# Altium PCB kernel.PcbDoc (part 3 of 7)
Units mil, origin at the board's own origin, x right, y up, seen from the top; angles counter-clockwise.
Board outline 2360 x 2450.34 mil, 6 copper layers (Top Layer, GND, SIGNAL, POWER, GND1, Bottom Layer), stack 32.112 mil thick; 150 components, 174 nets, 684 pads, 710 vias.
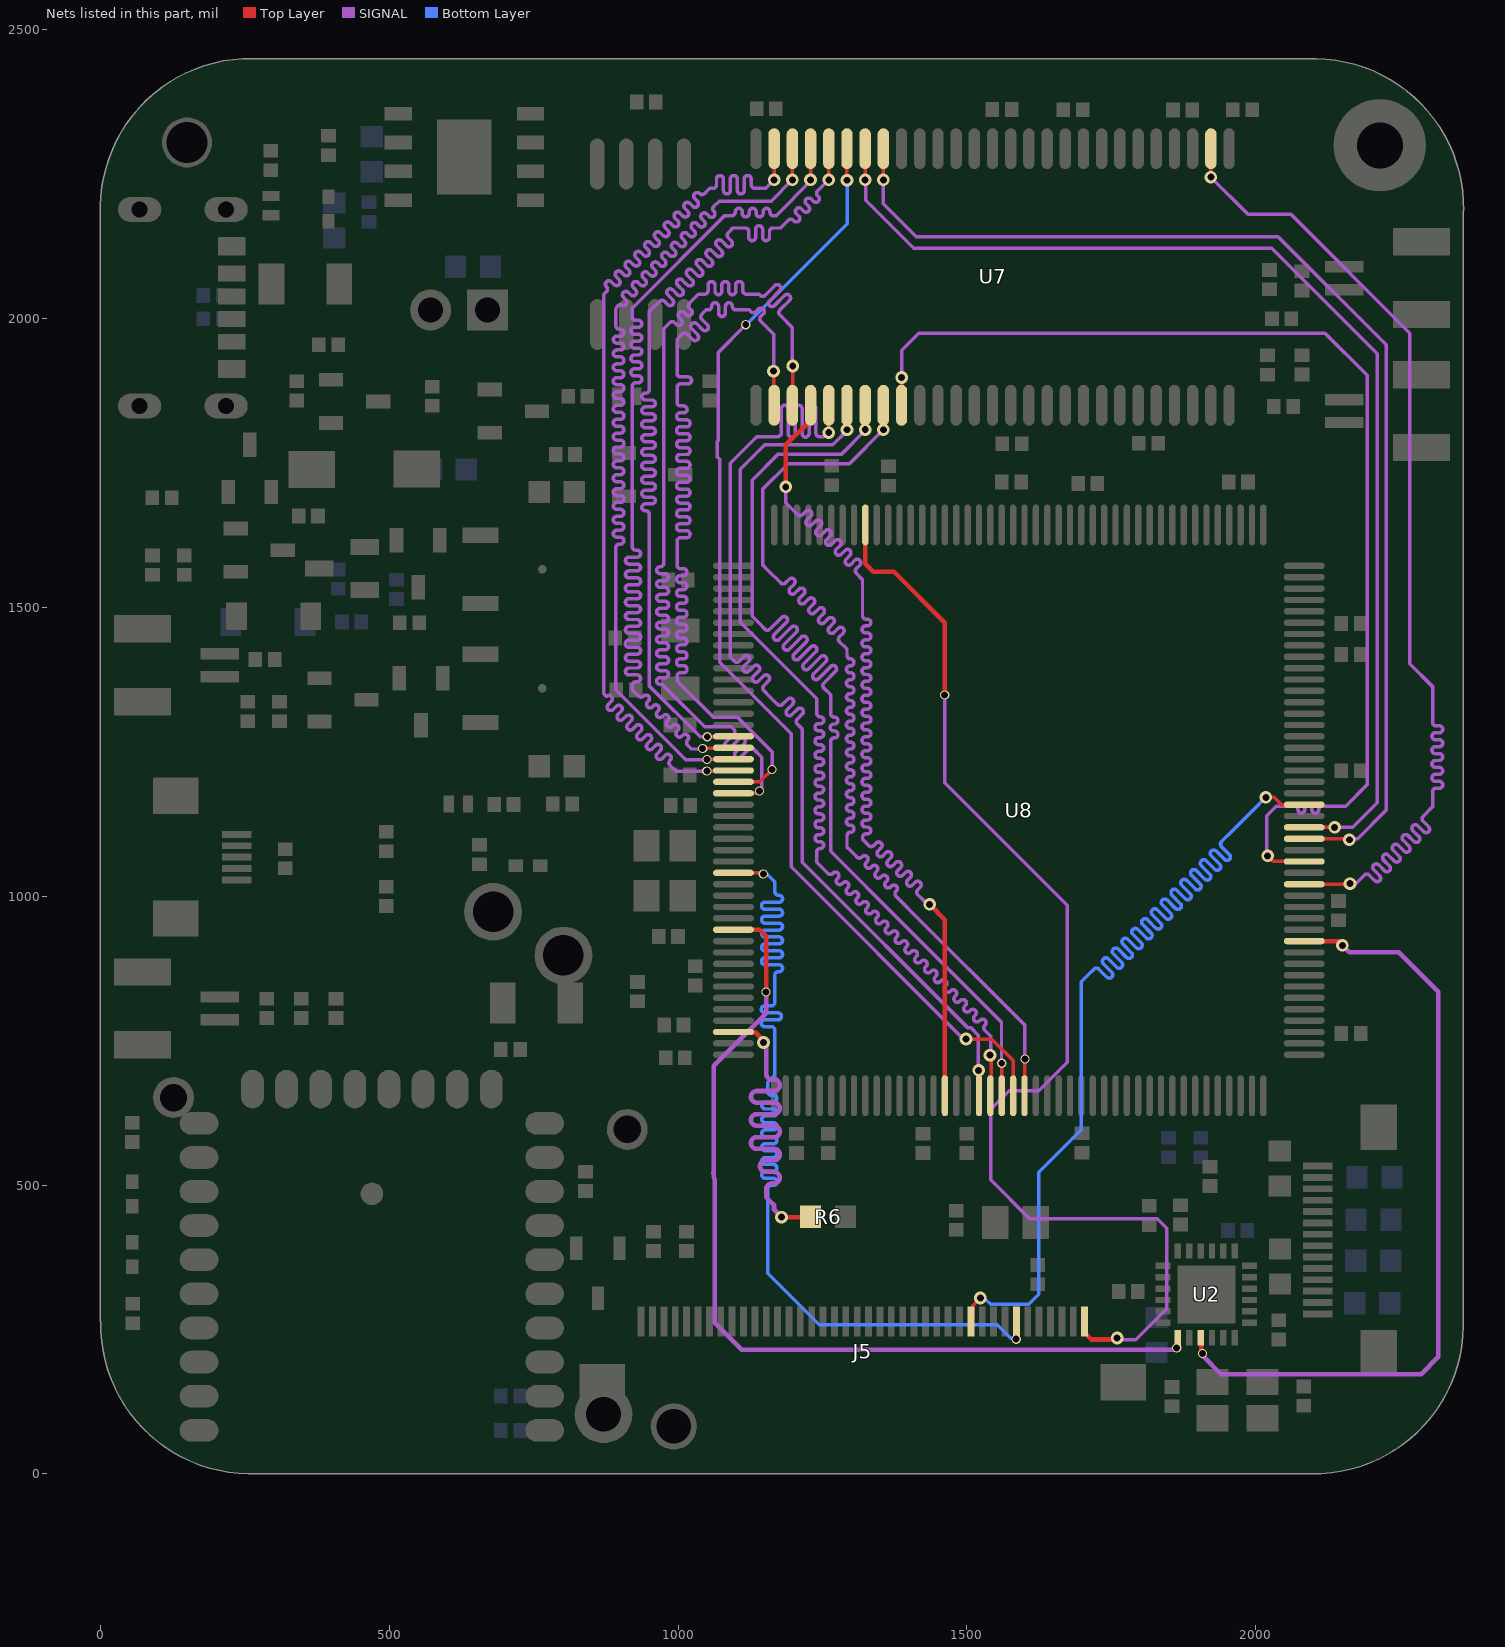
[diagram p6: the nets of this part, all layers, seen from the top]

## Via types
v1: diameter 22, hole 12, Top Layer to Bottom Layer, tented both sides, 583 vias
v2: diameter 16, hole 12, Top Layer to Bottom Layer, tented both sides, 111 vias
v3: diameter 23.62, hole 15.75, Top Layer to Bottom Layer, 8 vias
v4: diameter 28, hole 14, Top Layer to Bottom Layer, 5 vias
v5: diameter 22, hole 12, Top Layer to Bottom Layer, 3 vias

## Nets (pads, with @x,y where several pads share a name; then routed paths per layer and width w, separated by ;. In a path a pad name is that pad's centre, name@x,y a point inside that pad or via, vN(x,y) a via of type N, cw(c..) or ccw(c..) an arc to the next point about the centre after c; other vN are vias at no path point) (continued)
CLK: J5.30 U8.111 | length 1970.2
  Top Layer w6: J5.30@1507.01,263.94 1509.91,266.85 1509.91,291.38 1520.8,302.27 1521.13,302.27 v1(1523.39,304.53) ; v1@2017.27,1171.22 2032.26,1171.22 2044.78,1158.7 U8.111@2084.09,1158.7
  Bottom Layer w6: v1(1523.39,304.53) 1523.39,303.13 1523.9,302.61 1531.97,302.61 1541.16,293.41 1606.89,293.41 1624.56,311.08 1624.56,521.96 1698.17,595.57 1698.17,852.12 1709.48,863.43 1720.09,874.04 cw(c1724.33,869.8) 1728.57,874.04 1742.49,860.12 ccw(c1746.74,864.36) 1750.98,860.12 ccw(c1746.74,864.36) 1750.98,868.61 1736.35,883.23 cw(c1740.59,887.47) 1744.84,891.72 1759.46,877.09 ccw(c1763.71,881.33) 1767.95,877.09 ccw(c1763.71,881.33) 1767.95,885.58 1753.32,900.2 cw(c1757.56,904.45) 1753.32,908.69 cw(c1757.56,904.45) 1761.81,908.69 1776.43,894.06 ccw(c1780.68,898.3) 1784.92,894.06 ccw(c1780.68,898.3) 1784.92,902.55 1770.29,917.17 cw(c1774.54,921.42) 1770.29,925.66 cw(c1774.54,921.42) 1778.78,925.66 1793.4,911.03 ccw(c1797.65,915.28) 1801.89,919.52 1787.26,934.14 cw(c1791.51,938.39) 1787.26,942.63 cw(c1791.51,938.39) 1795.75,942.63 1810.37,928 ccw(c1814.62,932.25) 1818.86,928 ccw(c1814.62,932.25) 1818.86,936.49 1804.23,951.11 cw(c1808.48,955.36) 1804.23,959.6 cw(c1808.48,955.36) 1812.72,959.6 1827.35,944.97 ccw(c1831.59,949.22) 1835.83,944.97 ccw(c1831.59,949.22) 1835.83,953.46 1821.2,968.09 cw(c1825.45,972.33) 1821.2,976.57 cw(c1825.45,972.33) 1829.69,976.57 1844.32,961.94 ccw(c1848.56,966.19) 1852.8,970.43 1838.18,985.06 ; 1838.17,985.06 cw(c1842.42,989.3) 1838.17,993.54 ; 1838.18,993.54 cw(c1842.42,989.3) 1846.66,993.54 1861.29,978.91 ccw(c1865.53,983.16) 1869.77,978.91 ccw(c1865.53,983.16) 1869.77,987.4 1855.15,1002.03 cw(c1859.39,1006.27) 1855.15,1010.51 cw(c1859.39,1006.27) 1863.63,1010.51 1878.26,995.89 ccw(c1882.5,1000.13) 1886.74,995.89 ccw(c1882.5,1000.13) 1886.74,1004.37 1872.12,1019 cw(c1876.36,1023.24) 1880.6,1027.48 1895.23,1012.86 ccw(c1899.47,1017.1) 1903.71,1012.86 ccw(c1899.47,1017.1) 1903.71,1021.34 1889.09,1035.97 cw(c1893.33,1040.21) 1889.09,1044.45 cw(c1893.33,1040.21) 1897.57,1044.45 1912.2,1029.83 ccw(c1916.44,1034.07) 1920.68,1029.83 ccw(c1916.44,1034.07) 1920.68,1038.31 1906.06,1052.94 cw(c1910.3,1057.18) 1906.06,1061.42 cw(c1910.3,1057.18) 1914.54,1061.42 1929.17,1046.8 ccw(c1933.41,1051.04) 1937.65,1055.28 1923.03,1069.91 cw(c1927.27,1074.15) 1923.03,1078.39 cw(c1927.27,1074.15) 1931.51,1078.39 1946.14,1063.77 ccw(c1950.38,1068.01) 1954.62,1063.77 ccw(c1950.38,1068.01) 1954.62,1072.25 1940.71,1086.17 cw(c1944.95,1090.41) 1940.71,1094.66 1959.84,1113.79 1994.47,1148.43 v1@2017.27,1171.22
  other v1: 2017.54,1171.22
CS: J5.40 U8.168 | length 2054.5
  Top Layer w8: U8.168@1324.25,1642.95 1324.25,1575.66 1338.14,1561.77 1373.87,1561.77 1461.88,1473.76 v2@1461.88,1348.43 ; J5.40@1703.86,263.94 1703.86,244.26 1715.45,232.67 1757.6,232.67 v1(1760.24,235.3)
  SIGNAL w6: v2@1461.88,1348.43 1461.88,1196.34 1673.72,984.49 1673.72,712.48 1624.65,663.4 1573.25,663.4 1541.07,631.22 1541.07,509.22 1608.53,441.76 1829.32,441.76 1846,425.08 1846,286.13 1792.11,232.24 1763.3,232.24 v1(1760.24,235.3)
  other v2: 1461.62,1348.68
DEN: J5.34 U8.28 | length 1966
  Top Layer w6: U8.28@1095.91,1040.59 1144.15,1040.59 1146.34,1038.4 v2@1147.97,1038.4 ; J5.34@1585.74,263.94 1585.74,232.33 v2@1585.83,232.24
  Bottom Layer w6: v2@1147.97,1038.4 1149.11,1037.25 1155.48,1037.25 1167.68,1025.06 1167.68,1010.61 1167.68,1007.61 ccw(c1173.68,1007.61) 1173.68,1001.61 1174.93,1001.61 cw(c1174.93,995.61) 1174.93,989.61 1150.63,989.61 ccw(c1150.63,983.61) 1150.63,977.61 1174.93,977.61 cw(c1174.93,971.61) 1174.93,965.61 1150.63,965.61 ccw(c1150.63,959.61) 1150.63,953.61 1174.93,953.61 cw(c1174.93,947.61) 1174.93,941.61 1150.63,941.61 ccw(c1150.63,935.61) 1150.63,929.61 1174.93,929.61 cw(c1174.93,923.61) 1174.93,917.61 1150.63,917.61 ccw(c1150.63,911.61) 1150.63,905.61 1174.93,905.61 cw(c1174.93,899.61) 1174.93,893.61 1150.63,893.61 ccw(c1150.63,887.61) 1150.63,881.61 1174.93,881.61 cw(c1174.93,875.61) 1174.93,869.61 1173.68,869.61 ccw(c1173.68,863.61) 1167.68,863.61 1167.68,849 1167.68,827.05 1167.68,816.26 cw(c1161.68,816.26) 1161.68,810.26 1150.15,810.26 ccw(c1150.15,804.26) 1150.15,798.26 1172.95,798.26 cw(c1172.95,792.26) 1172.95,786.26 1150.15,786.26 ccw(c1150.15,780.26) 1150.15,774.26 1161.68,774.26 cw(c1161.68,768.26) 1167.68,768.26 1167.68,765.26 1167.68,690.51 1156.09,678.92 1155.38,678.21 1155.38,661.74 ccw(c1161.38,661.74) 1161.38,655.74 1165.21,655.74 cw(c1165.21,649.74) 1165.21,643.74 1151.15,643.74 ccw(c1151.15,637.74) 1151.15,631.74 1165.21,631.74 cw(c1165.21,625.74) 1165.21,619.74 1151.15,619.74 ccw(c1151.15,613.74) 1151.15,607.74 1165.21,607.74 cw(c1165.21,601.74) 1165.21,595.74 1151.15,595.74 ccw(c1151.15,589.74) 1151.15,583.74 1165.21,583.74 cw(c1165.21,577.74) 1165.21,571.74 1151.15,571.74 ccw(c1151.15,565.74) 1151.15,559.74 1165.21,559.74 cw(c1165.21,553.74) 1165.21,547.74 1151.15,547.74 ccw(c1151.15,541.74) 1151.15,535.74 1165.21,535.74 cw(c1165.21,529.74) 1165.21,523.74 1151.15,523.74 ccw(c1151.15,517.74) 1151.15,511.74 1165.21,511.74 cw(c1165.21,505.74) 1165.21,499.74 1161.38,499.74 ccw(c1161.38,493.74) 1155.38,493.74 1155.38,454.74 1155.38,347.13 1244.18,258.33 1552.73,258.33 1575.84,235.22 1583.41,235.22 v2(1585.33,233.31)
  other v2: 1147.71,1038.66
ETH_MDC: U2.13 U8.33 | length 1607.8
  Top Layer w8: U8.33@1095.91,942.17 1141.09,942.17 1152.68,930.59 v2@1152.68,834.16 ; v2@1860.95,215 1860.95,216.08 1863.8,218.93 1863.8,234.29 U2.13@1865.31,235.81
  SIGNAL w8: v2@1152.68,834.16 1152.68,797.31 1061.97,706.61 1061.97,529.36 ccw(c1106.87,522.4) 1061.44,522.5 1061.44,522.4 ccw(c1106.87,522.4) 1063.49,508.9 1063.49,261.47 1109.96,215 v2@1860.95,215
  other v2: 1863.17,217.83 1152.42,834.41
ETH_MDIO: R6.1 U8.42 | length 755.8
  Top Layer w8: U8.42@1095.91,765 1096.49,764.42 1133.57,764.42 v1@1152.68,745.32 ; v1(1179.24,444.6) 1228.97,444.6 R6.1@1229.37,445
  SIGNAL w8: v1@1152.68,745.32 1152.68,716.4 1152.68,692.9 ccw(c1162.68,692.9) 1162.68,682.9 1166.12,682.9 cw(c1166.12,672.9) 1166.12,662.9 1136.21,662.9 ccw(c1136.21,652.9) 1136.21,642.9 1166.12,642.9 cw(c1166.12,632.9) 1166.12,622.9 1136.21,622.9 ccw(c1136.21,612.9) 1136.21,602.9 1166.12,602.9 cw(c1166.12,592.9) 1166.12,582.9 1136.21,582.9 ccw(c1136.21,572.9) 1136.21,562.9 1166.12,562.9 cw(c1166.12,552.9) 1166.12,542.9 1151.95,542.9 ccw(c1151.95,532.9) 1151.95,522.9 1166.12,522.9 cw(c1166.12,512.9) 1166.12,502.9 1162.68,502.9 ccw(c1162.68,492.9) 1152.68,492.9 1152.68,478.78 1157.56,473.9 1166.25,465.21 1166.25,457.59 v1(1179.24,444.6)
  other v1: 1148.07,746.81
ETH_RESET: U2.15 U8.99 | length 1366.8
  Top Layer w8: U2.15@1904.68,235.81 1905.95,234.54 1905.95,210.22 v2@1908.12,208.05 ; U8.99@2084.09,922.48 2142.52,922.48 v1(2150,915)
  SIGNAL w8: v2@1908.12,208.05 1908.12,206.12 1910.12,204.12 1910.12,202.59 1939.92,172.79 2286.34,172.79 2316.24,202.69 2316.24,834.59 2248.03,902.8 2162.2,902.8 v1(2150,915)
  other v2: 1907.87,208.3
FMC_A0: U7.23 U8.16 | length 1994.8
  Top Layer w6: v2@1050.58,1275.64 1051.16,1276.23 1095.32,1276.23 U8.16@1095.91,1276.81 ; v1(1260.98,2240.22) U7.23@1260.98,2294.26
  SIGNAL w6: v2@1050.58,1275.64 1050.35,1275.87 1038.25,1275.87 950.55,1363.57 950.55,1658.19 950.55,1661.19 ccw(c944.55,1661.19) 944.55,1667.19 943.27,1667.19 cw(c943.27,1673.19) 943.27,1679.19 954.68,1679.19 ccw(c954.68,1685.19) 954.68,1691.19 943.27,1691.19 cw(c943.27,1697.19) 943.27,1703.19 954.68,1703.19 ccw(c954.68,1709.19) 954.68,1715.19 943.27,1715.19 cw(c943.27,1721.19) 943.27,1727.19 954.68,1727.19 ccw(c954.68,1733.19) 954.68,1739.19 943.27,1739.19 cw(c943.27,1745.19) 943.27,1751.19 954.68,1751.19 ccw(c954.68,1757.19) 954.68,1763.19 943.27,1763.19 cw(c943.27,1769.19) 943.27,1775.19 954.68,1775.19 ccw(c954.68,1781.19) 954.68,1787.19 943.27,1787.19 cw(c943.27,1793.19) 943.27,1799.19 954.68,1799.19 ccw(c954.68,1805.19) 954.68,1811.19 943.27,1811.19 cw(c943.27,1817.19) 943.27,1823.19 954.68,1823.19 ccw(c954.68,1829.19) 954.68,1835.19 943.27,1835.19 cw(c943.27,1841.19) 943.27,1847.19 954.68,1847.19 ccw(c954.68,1853.19) 954.68,1859.19 943.27,1859.19 cw(c943.27,1865.19) 943.27,1871.19 944.55,1871.19 ccw(c944.55,1877.19) 950.55,1877.19 950.55,1908.91 950.55,2012.47 957.44,2019.35 968.05,2029.96 cw(c972.29,2025.72) 976.53,2029.96 982.1,2024.4 ccw(c986.34,2028.64) 990.58,2024.4 ccw(c986.34,2028.64) 990.58,2032.88 982.19,2041.27 cw(c986.43,2045.52) 990.67,2049.76 999.07,2041.37 ccw(c1003.31,2045.61) 1007.55,2041.37 ccw(c1003.31,2045.61) 1007.55,2049.85 999.16,2058.24 cw(c1003.4,2062.49) 999.16,2066.73 cw(c1003.4,2062.49) 1007.64,2066.73 1016.04,2058.34 ccw(c1020.28,2062.58) 1024.52,2058.34 ccw(c1020.28,2062.58) 1024.52,2066.82 1016.13,2075.22 cw(c1020.37,2079.46) 1016.13,2083.7 cw(c1020.37,2079.46) 1024.61,2083.7 1033.01,2075.31 ccw(c1037.25,2079.55) 1041.49,2083.79 1033.1,2092.19 cw(c1037.34,2096.43) 1033.1,2100.67 cw(c1037.34,2096.43) 1041.58,2100.67 1049.98,2092.28 ccw(c1054.22,2096.52) 1058.46,2092.28 ccw(c1054.22,2096.52) 1058.46,2100.76 1050.07,2109.16 cw(c1054.31,2113.4) 1050.07,2117.64 cw(c1054.31,2113.4) 1058.56,2117.64 1066.95,2109.25 ccw(c1071.19,2113.49) 1075.43,2109.25 ccw(c1071.19,2113.49) 1075.43,2117.73 1067.04,2126.13 cw(c1071.28,2130.37) 1067.04,2134.61 cw(c1071.28,2130.37) 1075.53,2134.61 1083.92,2126.22 ccw(c1088.16,2130.46) 1092.4,2134.7 1086.84,2140.27 cw(c1091.08,2144.51) 1086.84,2148.75 1095,2156.92 1101.34,2156.92 1116.34,2156.92 cw(c1116.34,2150.92) 1122.34,2150.92 1122.34,2140.96 ccw(c1128.34,2140.96) 1134.34,2140.96 1134.34,2154.92 cw(c1140.34,2154.92) 1146.34,2154.92 1146.34,2140.96 ccw(c1152.34,2140.96) 1158.34,2140.96 1158.34,2150.92 cw(c1164.34,2150.92) 1164.34,2156.92 1177.44,2156.92 1180.21,2159.69 1190.82,2170.3 cw(c1195.06,2166.05) 1199.31,2170.3 1200.49,2169.11 ccw(c1204.74,2173.35) 1208.98,2169.11 ccw(c1204.74,2173.35) 1208.98,2177.59 1204.96,2181.61 cw(c1209.21,2185.85) 1213.45,2190.1 1217.46,2186.08 ccw(c1221.71,2190.32) 1225.95,2186.08 ccw(c1221.71,2190.32) 1225.95,2194.56 1221.93,2198.58 cw(c1226.18,2202.82) 1221.93,2207.07 cw(c1226.18,2202.82) 1230.42,2207.07 1234.43,2203.05 ccw(c1238.68,2207.29) 1242.92,2203.05 ccw(c1238.68,2207.29) 1242.92,2211.53 1241.73,2212.72 cw(c1245.97,2216.97) 1241.73,2221.21 1253.94,2233.42 1260.74,2240.22 v1(1260.98,2240.22)
  other v2: 1050.61,1276.19
FMC_A1: U7.24 U8.17 | length 2006.5
  Top Layer w6: v2@1042.72,1255 1043.9,1256.17 1094.95,1256.17 U8.17@1095.91,1257.13 ; v1(1229.49,2240.22) U7.24@1229.49,2294.26
  SIGNAL w6: 940.2,1346.56 cw(c935.95,1350.8) 931.71,1346.56 929.59,1348.68 925.07,1353.2 920.61,1357.66 920.61,1365.2 cw(c926.61,1365.2) 926.61,1371.2 929.18,1371.2 ccw(c929.18,1377.2) 929.18,1383.2 914.95,1383.2 cw(c914.95,1389.2) 914.95,1395.2 929.18,1395.2 ccw(c929.18,1401.2) 929.18,1407.2 914.95,1407.2 cw(c914.95,1413.2) 914.95,1419.2 929.18,1419.2 ccw(c929.18,1425.2) 929.18,1431.2 914.95,1431.2 cw(c914.95,1437.2) 914.95,1443.2 929.18,1443.2 ccw(c929.18,1449.2) 929.18,1455.2 914.95,1455.2 cw(c914.95,1461.2) 914.95,1467.2 929.18,1467.2 ccw(c929.18,1473.2) 929.18,1479.2 914.95,1479.2 cw(c914.95,1485.2) 914.95,1491.2 929.18,1491.2 ccw(c929.18,1497.2) 929.18,1503.2 914.95,1503.2 cw(c914.95,1509.2) 914.95,1515.2 929.18,1515.2 ccw(c929.18,1521.2) 929.18,1527.2 914.95,1527.2 cw(c914.95,1533.2) 914.95,1539.2 929.18,1539.2 ccw(c929.18,1545.2) 929.18,1551.2 914.95,1551.2 cw(c914.95,1557.2) 914.95,1563.2 929.18,1563.2 ccw(c929.18,1569.2) 929.18,1575.2 914.95,1575.2 cw(c914.95,1581.2) 914.95,1587.2 929.18,1587.2 ccw(c929.18,1593.2) 929.18,1599.2 926.61,1599.2 cw(c926.61,1605.2) 920.61,1605.2 920.61,1635.33 920.61,1868.07 920.61,1883.07 cw(c926.61,1883.07) 926.61,1889.07 931.33,1889.07 ccw(c931.33,1895.07) 931.33,1901.07 924.5,1901.07 cw(c924.5,1907.07) 924.5,1913.07 931.33,1913.07 ccw(c931.33,1919.07) 931.33,1925.07 924.5,1925.07 cw(c924.5,1931.07) 924.5,1937.07 931.33,1937.07 ccw(c931.33,1943.07) 931.33,1949.07 924.5,1949.07 cw(c924.5,1955.07) 924.5,1961.07 931.33,1961.07 ccw(c931.33,1967.07) 931.33,1973.07 924.5,1973.07 cw(c924.5,1979.07) 924.5,1985.07 931.33,1985.07 ccw(c931.33,1991.07) 931.33,1997.07 926.61,1997.07 cw(c926.61,2003.07) 920.61,2003.07 920.61,2018.38 925.65,2023.42 1080.4,2178.17 1090.19,2178.17 1093.19,2178.17 ccw(c1093.19,2184.17) 1099.19,2184.17 1099.19,2185.02 cw(c1105.19,2185.02) 1111.19,2185.02 1111.19,2182.17 ccw(c1117.19,2182.17) 1123.19,2182.17 1123.19,2185.02 cw(c1129.19,2185.02) 1135.19,2185.02 1135.19,2182.17 ccw(c1141.19,2182.17) 1147.19,2182.17 1147.19,2185.02 cw(c1153.19,2185.02) 1159.19,2185.02 1159.19,2184.17 ccw(c1165.19,2184.17) 1165.19,2178.17 1169.65,2178.17 1174.24,2182.76 1226.49,2235.01 1226.49,2235.6 1229.49,2238.6 v1(1229.49,2240.22) ; 940.22,1346.58 cw(c944.46,1342.34) 948.7,1346.58 cw(c944.46,1342.34) 948.7,1338.1 947.27,1336.66 ccw(c951.51,1332.42) 947.27,1328.18 ccw(c951.51,1332.42) 955.75,1328.18 957.19,1329.61 cw(c961.43,1325.37) 965.67,1321.13 964.24,1319.69 ccw(c968.48,1315.45) 964.24,1311.21 ccw(c968.48,1315.45) 972.72,1311.21 974.16,1312.64 cw(c978.4,1308.4) 982.64,1312.64 cw(c978.4,1308.4) 982.64,1304.16 981.21,1302.72 ccw(c985.45,1298.48) 981.21,1294.23 ccw(c985.45,1298.48) 989.69,1294.23 991.13,1295.67 cw(c995.37,1291.43) 999.61,1295.67 cw(c995.37,1291.43) 999.61,1287.19 998.18,1285.75 ccw(c1002.42,1281.51) 1006.66,1277.26 1008.1,1278.7 cw(c1012.34,1274.46) 1016.59,1278.7 cw(c1012.34,1274.46) 1016.59,1270.22 ; 1016.56,1270.19 ccw(c1020.81,1265.95) 1016.56,1261.71 1023.05,1255.22 1023.27,1255 v2@1041.95,1255 ; v2@1042.72,1255 v2@1041.95,1255 ; v2(1042.72,1255.78) v2@1041.95,1255
FMC_A2: U7.25 U8.18 | length 2012.7
  Top Layer w6: v2@1050.45,1236.72 1050.68,1236.95 1095.41,1236.95 U8.18@1095.91,1237.44 ; v1(1197.99,2240.22) U7.25@1197.99,2294.26
  SIGNAL w6: 900.97,2024.57 900.19,2024.38 ccw(c902.56,2014.42) 892.46,2016.11 892.46,2011.87 892.46,2007.63 892.46,2006.86 892.46,1987.77 ccw(c898.46,1987.77) 898.46,1981.77 900.2,1981.77 cw(c900.2,1975.77) 900.2,1969.77 893.98,1969.77 ccw(c893.98,1963.77) 893.98,1957.77 900.2,1957.77 cw(c900.2,1951.77) 900.2,1945.77 893.98,1945.77 ccw(c893.98,1939.77) 893.98,1933.77 900.2,1933.77 cw(c900.2,1927.77) 900.2,1921.77 893.98,1921.77 ccw(c893.98,1915.77) 893.98,1909.77 900.2,1909.77 cw(c900.2,1903.77) 900.2,1897.77 893.98,1897.77 ccw(c893.98,1891.77) 893.98,1885.77 900.2,1885.77 cw(c900.2,1879.77) 900.2,1873.77 893.98,1873.77 ccw(c893.98,1867.77) 893.98,1861.77 900.2,1861.77 cw(c900.2,1855.77) 900.2,1849.77 893.98,1849.77 ccw(c893.98,1843.77) 893.98,1837.77 900.2,1837.77 cw(c900.2,1831.77) 900.2,1825.77 893.98,1825.77 ccw(c893.98,1819.77) 893.98,1813.77 900.2,1813.77 cw(c900.2,1807.77) 900.2,1801.77 893.98,1801.77 ccw(c893.98,1795.77) 893.98,1789.77 900.2,1789.77 cw(c900.2,1783.77) 900.2,1777.77 893.98,1777.77 ccw(c893.98,1771.77) 893.98,1765.77 900.2,1765.77 cw(c900.2,1759.77) 900.2,1753.77 893.98,1753.77 ccw(c893.98,1747.77) 893.98,1741.77 900.2,1741.77 cw(c900.2,1735.77) 900.2,1729.77 893.98,1729.77 ccw(c893.98,1723.77) 893.98,1717.77 900.2,1717.77 cw(c900.2,1711.77) 900.2,1705.77 893.98,1705.77 ccw(c893.98,1699.77) 893.98,1693.77 900.2,1693.77 cw(c900.2,1687.77) 900.2,1681.77 893.98,1681.77 ccw(c893.98,1675.77) 893.98,1669.77 900.2,1669.77 cw(c900.2,1663.77) 900.2,1657.77 893.98,1657.77 ccw(c893.98,1651.77) 893.98,1645.77 900.2,1645.77 cw(c900.2,1639.77) 900.2,1633.77 893.98,1633.77 ccw(c893.98,1627.77) 893.98,1621.77 900.2,1621.77 cw(c900.2,1615.77) 900.2,1609.77 898.46,1609.77 ccw(c898.46,1603.77) 892.46,1603.77 892.46,1588.77 892.46,1357.35 1013.09,1236.72 v2@1050.45,1236.72 ; 901,2024.54 ccw(c905.24,2028.78) 909.49,2033.03 905.5,2037.01 cw(c909.75,2041.25) 905.5,2045.49 cw(c909.75,2041.25) 913.99,2045.49 917.97,2041.51 ccw(c922.21,2045.75) 926.46,2041.51 ccw(c922.21,2045.75) 926.46,2050 922.48,2053.98 cw(c926.72,2058.22) 922.48,2062.46 cw(c926.72,2058.22) 930.96,2062.46 934.94,2058.48 ccw(c939.18,2062.72) 943.43,2058.48 ccw(c939.18,2062.72) 943.43,2066.97 939.45,2070.95 cw(c943.69,2075.19) 947.93,2079.43 951.91,2075.45 ccw(c956.15,2079.69) 960.4,2075.45 ccw(c956.15,2079.69) 960.4,2083.94 956.42,2087.92 cw(c960.66,2092.16) 956.42,2096.4 cw(c960.66,2092.16) 964.9,2096.4 968.88,2092.42 ccw(c973.13,2096.67) 977.37,2092.42 ccw(c973.13,2096.67) 977.37,2100.91 973.39,2104.89 cw(c977.63,2109.13) 973.39,2113.37 cw(c977.63,2109.13) 981.87,2113.37 985.85,2109.39 ccw(c990.1,2113.64) 994.34,2109.39 ccw(c990.1,2113.64) 994.34,2117.88 990.36,2121.86 cw(c994.6,2126.1) 998.84,2130.34 1002.82,2126.36 ccw(c1007.07,2130.61) 1011.31,2126.36 ccw(c1007.07,2130.61) 1011.31,2134.85 1007.33,2138.83 cw(c1011.57,2143.07) 1007.33,2147.32 cw(c1011.57,2143.07) 1015.81,2147.32 1019.79,2143.33 ccw(c1024.04,2147.58) 1028.28,2143.33 ccw(c1024.04,2147.58) 1028.28,2151.82 1024.3,2155.8 cw(c1028.54,2160.04) 1024.3,2164.29 cw(c1028.54,2160.04) 1032.78,2164.29 1036.76,2160.31 ccw(c1041.01,2164.55) 1045.25,2168.79 1041.27,2172.77 cw(c1045.51,2177.01) 1041.27,2181.26 cw(c1045.51,2177.01) 1049.75,2181.26 1053.74,2177.28 ccw(c1057.98,2181.52) 1062.22,2177.28 ccw(c1057.98,2181.52) 1062.22,2185.76 1062.07,2185.92 cw(c1066.31,2190.16) 1062.06,2194.4 1071.1,2203.43 1082.85,2203.43 1084.51,2203.43 1161.2,2203.43 v1(1197.99,2240.22)
  other v2: 1050.2,1236.98
FMC_A3: U7.26 U8.19 | length 1997.6
  Top Layer w6: v2@1050.16,1216.44 1094.59,1216.44 U8.19@1095.91,1217.76 ; v1(1166.5,2240.22) U7.26@1166.5,2294.26
  SIGNAL w6: 876.07,2055.3 cw(c871.82,2051.06) 876.07,2046.81 873.94,2044.69 871.23,2041.98 871.23,1362.68 871.23,1358.44 871.23,1354.85 ccw(c881.47,1354.85) 876.09,1346.13 876.26,1346.03 cw(c880.5,1341.79) 884.74,1337.54 879.15,1331.96 ccw(c883.4,1327.71) 879.15,1323.47 ccw(c883.4,1327.71) 887.64,1323.47 893.23,1329.06 cw(c897.47,1324.82) 901.71,1329.06 cw(c897.47,1324.82) 901.71,1320.57 896.13,1314.99 ccw(c900.37,1310.74) 896.13,1306.5 ccw(c900.37,1310.74) 904.61,1306.5 910.2,1312.09 cw(c914.44,1307.85) 918.68,1312.09 cw(c914.44,1307.85) 918.68,1303.6 913.1,1298.02 ccw(c917.34,1293.77) 913.1,1289.53 ccw(c917.34,1293.77) 921.58,1289.53 927.17,1295.12 cw(c931.41,1290.88) 935.65,1286.63 930.07,1281.04 ccw(c934.31,1276.8) 930.07,1272.56 ccw(c934.31,1276.8) 938.55,1272.56 944.14,1278.15 cw(c948.38,1273.91) 952.63,1278.15 cw(c948.38,1273.91) 952.63,1269.66 947.04,1264.07 ccw(c951.28,1259.83) 947.04,1255.59 ccw(c951.28,1259.83) 955.52,1255.59 961.11,1261.18 cw(c965.35,1256.93) 969.6,1261.18 cw(c965.35,1256.93) 969.6,1252.69 964.01,1247.1 ccw(c968.25,1242.86) 972.49,1238.62 978.08,1244.21 cw(c982.32,1239.96) 986.57,1244.21 cw(c982.32,1239.96) 986.57,1235.72 986.01,1235.17 ccw(c990.26,1230.92) 986.01,1226.68 996.62,1216.08 1049.8,1216.08 v2@1050.16,1216.44 ; 876.04,2055.33 cw(c880.28,2059.57) 876.04,2063.81 cw(c880.28,2059.57) 884.52,2063.81 889.44,2058.9 ccw(c893.68,2063.14) 897.92,2058.9 ccw(c893.68,2063.14) 897.92,2067.38 893.01,2072.3 cw(c897.25,2076.54) 901.49,2080.78 906.41,2075.87 ccw(c910.65,2080.11) 914.89,2075.87 ccw(c910.65,2080.11) 914.9,2084.35 909.98,2089.27 cw(c914.22,2093.51) 909.98,2097.76 cw(c914.22,2093.51) 918.46,2097.76 923.38,2092.84 ccw(c927.62,2097.08) 931.87,2092.84 ccw(c927.62,2097.08) 931.87,2101.32 926.95,2106.24 cw(c931.19,2110.48) 926.95,2114.73 cw(c931.19,2110.48) 935.43,2114.73 940.35,2109.81 ccw(c944.59,2114.05) 948.84,2118.29 943.92,2123.21 cw(c948.16,2127.45) 943.92,2131.7 cw(c948.16,2127.45) 952.4,2131.7 957.32,2126.78 ccw(c961.56,2131.02) 965.81,2126.78 ccw(c961.56,2131.02) 965.81,2135.26 960.89,2140.18 cw(c965.13,2144.42) 960.89,2148.67 cw(c965.13,2144.42) 969.37,2148.67 974.29,2143.75 ccw(c978.53,2147.99) 982.78,2143.75 ccw(c978.53,2147.99) 982.78,2152.23 977.86,2157.15 cw(c982.1,2161.39) 977.86,2165.64 cw(c982.1,2161.39) 986.34,2165.64 991.26,2160.72 ccw(c995.51,2164.96) 999.75,2169.21 994.83,2174.12 cw(c999.07,2178.37) 994.83,2182.61 cw(c999.07,2178.37) 1003.32,2182.61 1008.23,2177.69 ccw(c1012.48,2181.93) 1016.72,2177.69 ccw(c1012.48,2181.93) 1016.72,2186.18 1011.8,2191.09 cw(c1016.04,2195.34) 1011.8,2199.58 cw(c1016.04,2195.34) 1020.29,2199.58 1025.2,2194.66 ccw(c1029.45,2198.9) 1033.69,2194.66 ccw(c1029.45,2198.9) 1033.69,2203.15 1028.77,2208.06 cw(c1033.01,2212.31) 1037.26,2216.55 ; 1037.29,2216.52 ccw(c1041.53,2220.76) 1045.77,2216.52 1052.56,2223.31 1054.93,2225.68 1057.62,2225.68 1060.62,2225.68 ccw(c1060.62,2231.68) 1066.62,2231.68 1066.62,2241.87 cw(c1072.62,2241.87) 1078.62,2241.87 1078.62,2221.96 ccw(c1084.62,2221.96) 1090.62,2221.96 1090.62,2241.87 cw(c1096.62,2241.87) 1102.62,2241.87 1102.62,2221.96 ccw(c1108.62,2221.96) 1114.62,2221.96 1114.62,2241.87 cw(c1120.62,2241.87) 1126.62,2241.87 1126.62,2231.68 ccw(c1132.62,2231.68) 1132.62,2225.68 1151.96,2225.68 1152.61,2226.33 v1(1166.5,2240.22)
  other v2: 1049.91,1216.69
FMC_A4: U7.29 U8.20 | length 2004.4
  Top Layer w6: U8.20@1095.91,1198.07 1141.69,1198.07 v2@1162.72,1219.1 ; v1(1165.41,1909.09) 1165.41,1851.09 U7.29@1166.5,1850
  SIGNAL w6: 1032.09,1991.02 1042.4,1980.71 ccw(c1046.64,1984.95) 1050.89,1980.71 ccw(c1046.65,1984.95) 1050.89,1989.19 1041.28,1998.8 cw(c1045.52,2003.05) 1041.28,2007.29 1049.13,2015.14 1052.14,2015.14 ccw(c1052.14,2021.14) 1058.14,2021.14 1058.14,2021.58 cw(c1064.14,2021.58) 1070.14,2021.58 1070.14,2009.58 ccw(c1076.14,2009.58) 1082.14,2009.58 1082.14,2021.58 cw(c1088.14,2021.58) 1094.14,2021.58 1094.14,2021.14 ccw(c1100.14,2021.14) 1100.14,2015.14 1123.27,2015.14 1124.08,2014.33 1126.2,2012.21 ccw(c1130.45,2016.45) 1134.69,2012.21 1139.13,2016.65 cw(c1143.37,2012.41) 1147.62,2016.65 cw(c1143.37,2012.41) 1147.62,2008.17 1143.17,2003.72 ccw(c1147.42,1999.48) 1143.17,1995.24 1165.54,1972.88 1165.54,1909.21 v1(1165.41,1909.09) ; 1032.09,1991.03 ccw(c1027.84,1986.78) 1023.6,1982.54 1033.92,1972.22 cw(c1029.67,1967.98) 1033.92,1963.74 cw(c1029.67,1967.98) 1025.43,1963.74 1015.82,1973.35 ccw(c1011.58,1969.1) 1007.34,1973.35 998.4,1964.41 998.4,1961.07 998.4,1956.58 998.4,1905.06 ccw(c1004.4,1905.06) 1004.4,1899.06 1017.41,1899.06 cw(c1017.41,1893.06) 1017.41,1887.06 1004.4,1887.06 ccw(c1004.4,1881.06) 998.4,1881.06 998.4,1866.06 998.4,1854.81 ccw(c1004.4,1854.81) 1004.4,1848.81 1009.73,1848.81 cw(c1009.73,1842.81) 1009.73,1836.81 1003.4,1836.81 ccw(c1003.4,1830.81) 1003.4,1824.81 1014.84,1824.81 cw(c1014.84,1818.81) 1014.84,1812.81 1003.4,1812.81 ccw(c1003.4,1806.81) 1003.4,1800.81 1014.84,1800.81 cw(c1014.84,1794.81) 1014.84,1788.81 1003.4,1788.81 ccw(c1003.4,1782.81) 1003.4,1776.81 1014.84,1776.81 cw(c1014.84,1770.81) 1014.84,1764.81 1003.4,1764.81 ccw(c1003.4,1758.81) 1003.4,1752.81 1014.84,1752.81 cw(c1014.84,1746.81) 1014.84,1740.81 1003.4,1740.81 ccw(c1003.4,1734.81) 1003.4,1728.81 1014.84,1728.81 cw(c1014.84,1722.81) 1014.84,1716.81 1003.4,1716.81 ccw(c1003.4,1710.81) 1003.4,1704.81 1014.84,1704.81 cw(c1014.84,1698.81) 1014.84,1692.81 1003.4,1692.81 ccw(c1003.4,1686.81) 1003.4,1680.81 1014.84,1680.81 cw(c1014.84,1674.81) 1014.84,1668.81 1003.4,1668.81 ccw(c1003.4,1662.81) 1003.4,1656.81 1014.84,1656.81 cw(c1014.84,1650.81) 1014.84,1644.81 1003.4,1644.81 ccw(c1003.4,1638.81) 1003.4,1632.81 1014.84,1632.81 cw(c1014.84,1626.81) 1014.84,1620.81 1004.4,1620.81 ccw(c1004.4,1614.81) 998.4,1614.81 998.4,1599.81 998.4,1599.04 998.4,1573.07 ccw(c1004.4,1573.07) 1004.4,1567.07 1009.58,1567.07 cw(c1009.58,1561.07) 1009.58,1555.07 1003.4,1555.07 ccw(c1003.4,1549.07) 1003.4,1543.07 1009.58,1543.07 cw(c1009.58,1537.07) 1009.58,1531.07 1003.4,1531.07 ccw(c1003.4,1525.07) 1003.4,1519.07 1009.58,1519.07 cw(c1009.58,1513.07) 1009.58,1507.07 1003.4,1507.07 ccw(c1003.4,1501.07) 1003.4,1495.07 1009.58,1495.07 cw(c1009.58,1489.07) 1009.58,1483.07 1003.4,1483.07 ccw(c1003.4,1477.07) 1003.4,1471.07 1009.58,1471.07 cw(c1009.58,1465.07) 1009.58,1459.07 1003.4,1459.07 ccw(c1003.4,1453.07) 1003.4,1447.07 1009.58,1447.07 cw(c1009.58,1441.07) 1009.58,1435.07 1003.4,1435.07 ccw(c1003.4,1429.07) 1003.4,1423.07 1009.58,1423.07 cw(c1009.58,1417.07) 1009.58,1411.07 1003.4,1411.07 ccw(c1003.4,1405.07) 1003.4,1399.07 1009.58,1399.07 cw(c1009.58,1393.07) 1009.58,1387.07 1004.4,1387.07 ccw(c1004.4,1381.07) 998.4,1381.07 998.4,1372.84 1002.17,1369.07 1061.45,1309.79 1103.01,1309.79 1162.72,1250.09 v2@1162.72,1219.1
  other v2: 1162.46,1219.36
FMC_A5: U7.30 U8.21 | length 1999.6
  Top Layer w6: U8.21@1095.91,1178.39 1136.1,1178.39 v2@1139.09,1181.38 ; U7.30@1197.99,1850 1198.2,1850.21 1197.61,1850.8 1198.59,1851.79 v1(1198.59,1918.18)
  SIGNAL w6: v2@1139.09,1181.38 1139.09,1181.89 1145.1,1187.9 1145.1,1240.66 1144.26,1241.5 1130.73,1255.02 ccw(c1126.49,1250.78) 1122.25,1255.02 1108.1,1240.88 cw(c1103.86,1245.12) 1099.62,1240.88 cw(c1103.86,1245.12) 1099.62,1249.36 1114.47,1264.22 ccw(c1110.23,1268.46) 1114.47,1272.7 ccw(c1110.23,1268.46) 1105.98,1272.7 1091.13,1257.85 cw(c1086.89,1262.09) 1082.64,1266.33 1096.79,1280.48 ccw(c1092.55,1284.72) 1096.79,1288.97 1092,1293.76 1084.61,1293.76 1045.96,1293.76 979.09,1360.63 974.84,1364.87 ccw(c970.6,1360.63) 970.6,1366.63 969.06,1366.63 cw(c969.06,1372.63) 969.06,1378.63 977.65,1378.63 ccw(c977.65,1384.63) 977.65,1390.63 969.06,1390.63 cw(c969.06,1396.63) 969.06,1402.63 977.65,1402.63 ccw(c977.65,1408.63) 977.65,1414.63 969.06,1414.63 cw(c969.06,1420.63) 969.06,1426.63 977.65,1426.63 ccw(c977.65,1432.63) 977.65,1438.63 969.06,1438.63 cw(c969.06,1444.63) 969.06,1450.63 977.65,1450.63 ccw(c977.65,1456.63) 977.65,1462.63 969.06,1462.63 cw(c969.06,1468.63) 969.06,1474.63 977.65,1474.63 ccw(c977.65,1480.63) 977.65,1486.63 969.06,1486.63 cw(c969.06,1492.63) 969.06,1498.63 977.65,1498.63 ccw(c977.65,1504.63) 977.65,1510.63 969.06,1510.63 cw(c969.06,1516.63) 969.06,1522.63 977.65,1522.63 ccw(c977.65,1528.63) 977.65,1534.63 969.06,1534.63 cw(c969.06,1540.63) 969.06,1546.63 977.65,1546.63 ccw(c977.65,1552.63) 977.65,1558.63 969.06,1558.63 cw(c969.06,1564.63) 969.06,1570.63 969.2,1570.63 ccw(c969.2,1576.63) 975.2,1576.63 975.2,1606.94 975.2,1982.24 985.8,1992.84 cw(c990.04,1988.6) 994.29,1992.84 997.31,1989.82 ccw(c1001.55,1994.06) 1005.8,1989.82 ccw(c1001.55,1994.06) 1005.8,1998.3 1002.07,2002.03 cw(c1006.31,2006.28) 1010.55,2010.52 1014.28,2006.79 ccw(c1018.52,2011.03) 1022.77,2006.79 ccw(c1018.52,2011.03) 1022.77,2015.28 1019.74,2018.3 cw(c1023.99,2022.54) 1019.74,2026.78 1032.68,2039.72 1035.46,2042.5 1043,2042.5 1046,2042.5 ccw(c1046,2048.5) 1052,2048.5 1052,2058.33 cw(c1058,2058.33) 1064,2058.33 1064,2047.5 ccw(c1070,2047.5) 1076,2047.5 1076,2058.33 cw(c1082,2058.33) 1088,2058.33 1088,2047.5 ccw(c1094,2047.5) 1100,2047.5 1100,2058.33 cw(c1106,2058.33) 1112,2058.33 1112,2048.5 ccw(c1118,2048.5) 1118,2042.5 1138.72,2042.5 1140.15,2042.5 1142.27,2040.38 ccw(c1146.51,2044.62) 1150.75,2040.38 1167.64,2057.26 cw(c1171.88,2053.02) 1176.12,2057.26 cw(c1171.88,2053.02) 1176.12,2048.77 1158.53,2031.18 ccw(c1162.77,2026.94) 1158.53,2022.7 ccw(c1162.77,2026.94) 1167.02,2022.7 1184.61,2040.29 cw(c1188.85,2036.05) 1193.09,2031.8 1176.21,2014.92 ccw(c1180.45,2010.68) 1176.21,2006.44 1197.95,1984.69 1197.95,1982.32 1197.95,1918.82 v1(1198.59,1918.18)
  other v2: 1140.95,1182.45
FMC_A6: U7.31 U8.60 | length 1983.4
  Top Layer w8: v1(1186.46,1708.79) 1186.46,1781.38 1229.49,1824.41 U7.31@1229.49,1850 ; v1(1435.63,986.09) 1462.05,959.67 U8.60@1462.05,654.77
  SIGNAL w6: v1(1186.46,1708.79) 1186.46,1681.18 1206.92,1660.72 ccw(c1211.16,1664.96) 1215.4,1660.72 1221.32,1666.64 cw(c1225.57,1662.4) 1229.81,1666.64 cw(c1225.57,1662.4) 1229.81,1658.16 1223.18,1651.53 ccw(c1227.42,1647.29) 1223.18,1643.04 ccw(c1227.42,1647.29) 1231.67,1643.04 1238.3,1649.67 cw(c1242.54,1645.43) 1246.78,1649.67 cw(c1242.54,1645.43) 1246.78,1641.19 1240.15,1634.56 ccw(c1244.39,1630.31) 1240.15,1626.07 ccw(c1244.39,1630.31) 1248.64,1626.07 1255.27,1632.7 cw(c1259.51,1628.46) 1263.75,1624.22 1257.12,1617.59 ccw(c1261.36,1613.34) 1257.12,1609.1 ccw(c1261.36,1613.34) 1265.61,1609.1 1272.24,1615.73 cw(c1276.48,1611.49) 1280.72,1615.73 cw(c1276.48,1611.49) 1280.72,1607.25 1274.09,1600.62 ccw(c1278.34,1596.37) 1274.09,1592.13 ccw(c1278.34,1596.37) 1282.58,1592.13 1289.21,1598.76 cw(c1293.45,1594.52) 1297.69,1598.76 cw(c1293.45,1594.52) 1297.69,1590.27 1291.06,1583.65 ccw(c1295.31,1579.4) 1299.55,1575.16 1306.18,1581.79 cw(c1310.42,1577.55) 1314.66,1581.79 cw(c1310.42,1577.55) 1314.66,1573.3 1308.74,1567.38 ccw(c1312.98,1563.14) 1308.74,1558.9 1319.35,1548.29 1319.35,1509.2 1319.35,1485.97 ccw(c1325.35,1485.97) 1325.35,1479.97 1327.75,1479.97 cw(c1327.75,1473.97) 1327.75,1467.97 1324.35,1467.97 ccw(c1324.35,1461.97) 1324.35,1455.97 1327.75,1455.97 cw(c1327.75,1449.97) 1327.75,1443.97 1324.35,1443.97 ccw(c1324.35,1437.97) 1324.35,1431.97 1327.75,1431.97 cw(c1327.75,1425.97) 1327.75,1419.97 1324.35,1419.97 ccw(c1324.35,1413.97) 1324.35,1407.97 1327.75,1407.97 cw(c1327.75,1401.97) 1327.75,1395.97 1324.35,1395.97 ccw(c1324.35,1389.97) 1324.35,1383.97 1327.75,1383.97 cw(c1327.75,1377.97) 1327.75,1371.97 1324.35,1371.97 ccw(c1324.35,1365.97) 1324.35,1359.97 1327.75,1359.97 cw(c1327.75,1353.97) 1327.75,1347.97 1324.35,1347.97 ccw(c1324.35,1341.97) 1324.35,1335.97 1327.75,1335.97 cw(c1327.75,1329.97) 1327.75,1323.97 1324.35,1323.97 ccw(c1324.35,1317.97) 1324.35,1311.97 1327.75,1311.97 cw(c1327.75,1305.97) 1327.75,1299.97 1324.35,1299.97 ccw(c1324.35,1293.97) 1324.35,1287.97 1327.75,1287.97 cw(c1327.75,1281.97) 1327.75,1275.97 1324.35,1275.97 ccw(c1324.35,1269.97) 1324.35,1263.97 1327.75,1263.97 cw(c1327.75,1257.97) 1327.75,1251.97 1324.35,1251.97 ccw(c1324.35,1245.97) 1324.35,1239.97 1327.75,1239.97 cw(c1327.75,1233.97) 1327.75,1227.97 1324.35,1227.97 ccw(c1324.35,1221.97) 1324.35,1215.97 1327.75,1215.97 cw(c1327.75,1209.97) 1327.75,1203.97 1324.35,1203.97 ccw(c1324.35,1197.97) 1324.35,1191.97 1327.75,1191.97 cw(c1327.75,1185.97) 1327.75,1179.97 1324.35,1179.97 ccw(c1324.35,1173.97) 1324.35,1167.97 1327.75,1167.97 cw(c1327.75,1161.97) 1327.75,1155.97 1324.35,1155.97 ccw(c1324.35,1149.97) 1324.35,1143.97 1327.75,1143.97 cw(c1327.75,1137.97) 1327.75,1131.97 1324.35,1131.97 ccw(c1324.35,1125.97) 1324.35,1119.97 1327.75,1119.97 cw(c1327.75,1113.97) 1327.75,1107.97 1325.35,1107.97 ccw(c1325.35,1101.97) 1319.35,1101.97 1319.35,1098.58 1327.96,1089.97 1330.08,1087.85 ccw(c1334.32,1092.09) 1338.57,1087.85 1342.98,1092.26 cw(c1347.22,1088.02) 1351.46,1092.26 cw(c1347.22,1088.02) 1351.46,1083.78 1346.34,1078.66 ccw(c1350.59,1074.41) 1346.34,1070.17 ccw(c1350.59,1074.41) 1354.83,1070.17 1359.95,1075.29 cw(c1364.19,1071.05) 1368.43,1066.81 1363.31,1061.69 ccw(c1367.56,1057.44) 1363.31,1053.2 ccw(c1367.56,1057.44) 1371.8,1053.2 1376.92,1058.32 cw(c1381.16,1054.08) 1385.41,1058.32 cw(c1381.16,1054.08) 1385.41,1049.83 1380.29,1044.71 ccw(c1384.53,1040.47) 1380.29,1036.23 ccw(c1384.53,1040.47) 1388.77,1036.23 1393.89,1041.35 cw(c1398.13,1037.11) 1402.38,1041.35 cw(c1398.13,1037.11) 1402.38,1032.86 1397.26,1027.74 ccw(c1401.5,1023.5) 1405.74,1019.26 1410.86,1024.38 cw(c1415.1,1020.14) 1419.35,1024.38 cw(c1415.1,1020.14) 1419.35,1015.89 1414.93,1011.48 ccw(c1419.18,1007.24) 1414.93,1003 1424.32,993.61 v1@1431.84,986.09
FMC_A7: U7.32 U8.63 | length 2010.3
  Top Layer w6: v1(1260.98,1802.69) U7.32@1260.98,1850 ; v1(1520.53,698.66) 1521.23,697.96 1521.23,654.91 U8.63@1521.1,654.77
  SIGNAL w6: v1(1260.98,1802.69) 1259.92,1802.69 1259.39,1802.69 1252.55,1795.86 1244.78,1795.86 cw(c1244.78,1801.86) 1238.78,1801.86 1238.78,1844.01 ccw(c1232.78,1844.01) 1226.78,1844.01 1226.78,1800.86 cw(c1220.78,1800.86) 1214.78,1800.86 1214.78,1844.01 ccw(c1208.78,1844.01) 1202.78,1844.01 1202.78,1800.86 cw(c1196.78,1800.86) 1190.78,1800.86 1190.78,1844.01 ccw(c1184.78,1844.01) 1178.78,1844.01 1178.78,1801.86 cw(c1172.78,1801.86) 1172.78,1795.86 1169.77,1795.86 1136.26,1795.86 1090.19,1749.79 1090.19,1414.41 1097.49,1407.11 ccw(c1101.73,1411.36) 1105.97,1407.11 1114.25,1415.39 cw(c1118.49,1411.15) 1122.74,1415.39 cw(c1118.49,1411.15) 1122.74,1406.91 1113.75,1397.92 ccw(c1117.99,1393.68) 1113.75,1389.44 ccw(c1117.99,1393.68) 1122.24,1389.44 1131.22,1398.42 cw(c1135.46,1394.18) 1139.71,1398.42 cw(c1135.46,1394.18) 1139.71,1389.94 1130.72,1380.95 ccw(c1134.96,1376.71) 1139.21,1372.47 1148.19,1381.45 cw(c1152.43,1377.21) 1156.68,1381.45 cw(c1152.43,1377.21) 1156.68,1372.97 1148.4,1364.69 ccw(c1152.64,1360.44) 1148.4,1356.2 1159.01,1345.59 1170.33,1334.27 1172.45,1332.15 ccw(c1176.69,1336.39) 1180.94,1332.15 1189.89,1341.11 cw(c1194.14,1336.86) 1198.38,1341.11 cw(c1194.14,1336.86) 1198.38,1332.62 1188.71,1322.96 ccw(c1192.96,1318.71) 1188.71,1314.47 ccw(c1192.96,1318.71) 1197.2,1314.47 1206.86,1324.14 cw(c1211.11,1319.89) 1215.35,1315.65 1206.39,1306.69 ccw(c1210.63,1302.45) 1206.39,1298.21 1215,1289.6 1215,1058.99 1501.2,772.79 1506.72,772.79 1520,759.5 1520,699.19 v1(1520.53,698.66)
FMC_A8: U7.33 U8.64 | length 1981.4
  Top Layer w6: v1(1292.48,1807.67) U7.33@1292.48,1850 ; U8.64@1540.79,654.77 1542.47,656.46 1542.47,716.05 v1@1541.16,717.36
  SIGNAL w6: v1(1292.48,1807.67) 1292.48,1806.08 1268,1781.6 1150.15,1781.6 1107.84,1739.28 1107.84,1474.16 1240,1342 1240,1331.73 1240,1316.72 ccw(c1246,1316.72) 1246,1310.72 1246.08,1310.72 cw(c1246.08,1304.72) 1246.08,1298.72 1243.11,1298.72 ccw(c1243.11,1292.72) 1243.11,1286.72 1246.08,1286.72 cw(c1246.08,1280.72) 1246.08,1274.72 1243.11,1274.72 ccw(c1243.11,1268.72) 1243.11,1262.72 1246.08,1262.72 cw(c1246.08,1256.72) 1246.08,1250.72 1243.11,1250.72 ccw(c1243.11,1244.72) 1243.11,1238.72 1246.08,1238.72 cw(c1246.08,1232.72) 1246.08,1226.72 1243.11,1226.72 ccw(c1243.11,1220.72) 1243.11,1214.72 1246.08,1214.72 cw(c1246.08,1208.72) 1246.08,1202.72 1243.11,1202.72 ccw(c1243.11,1196.72) 1243.11,1190.72 1246.08,1190.72 cw(c1246.08,1184.72) 1246.08,1178.72 1243.11,1178.72 ccw(c1243.11,1172.72) 1243.11,1166.72 1246.08,1166.72 cw(c1246.08,1160.72) 1246.08,1154.72 1243.11,1154.72 ccw(c1243.11,1148.72) 1243.11,1142.72 1246.08,1142.72 cw(c1246.08,1136.72) 1246.08,1130.72 1243.11,1130.72 ccw(c1243.11,1124.72) 1243.11,1118.72 1246.08,1118.72 cw(c1246.08,1112.72) 1246.08,1106.72 1243.11,1106.72 ccw(c1243.11,1100.72) 1243.11,1094.72 1246.08,1094.72 cw(c1246.08,1088.72) 1246.08,1082.72 1246,1082.72 ccw(c1246,1076.72) 1240,1076.72 1240,1061.72 1240,1059.16 1259.47,1039.69 ccw(c1263.71,1043.93) 1267.96,1039.69 1268.4,1040.13 cw(c1272.64,1035.89) 1276.88,1040.13 cw(c1272.64,1035.89) 1276.88,1031.64 1275.74,1030.49 ccw(c1279.98,1026.25) 1275.73,1022.01 ccw(c1279.98,1026.25) 1284.22,1022.01 1285.37,1023.16 cw(c1289.61,1018.92) 1293.86,1014.67 1292.71,1013.52 ccw(c1296.95,1009.28) 1292.71,1005.04 ccw(c1296.95,1009.28) 1301.19,1005.04 1302.34,1006.19 cw(c1306.58,1001.95) 1310.83,1006.19 cw(c1306.58,1001.95) 1310.83,997.7 1309.68,996.55 ccw(c1313.92,992.31) 1309.68,988.07 ccw(c1313.92,992.31) 1318.16,988.07 1319.31,989.22 cw(c1323.55,984.97) 1327.8,989.22 cw(c1323.55,984.97) 1327.8,980.73 1326.65,979.58 ccw(c1330.89,975.34) 1326.65,971.1 ccw(c1330.89,975.34) 1335.13,971.1 1336.28,972.25 cw(c1340.52,968) 1344.77,963.76 1343.62,962.61 ccw(c1347.86,958.37) 1343.62,954.13 ccw(c1347.86,958.37) 1352.1,954.13 1353.25,955.28 cw(c1357.49,951.03) 1361.74,955.28 cw(c1357.5,951.03) 1361.74,946.79 1360.59,945.64 ccw(c1364.83,941.4) 1360.59,937.16 ccw(c1364.83,941.4) 1369.07,937.16 1370.22,938.31 cw(c1374.47,934.06) 1378.71,938.31 cw(c1374.47,934.06) 1378.71,929.82 1377.56,928.67 ccw(c1381.8,924.43) 1386.04,920.19 1387.19,921.34 cw(c1391.44,917.09) 1395.68,921.34 cw(c1391.44,917.09) 1395.68,912.85 1394.53,911.7 ccw(c1398.77,907.46) 1394.53,903.21 ccw(c1398.77,907.46) 1403.01,903.21 1404.16,904.36 cw(c1408.41,900.12) 1412.65,904.36 cw(c1408.41,900.12) 1412.65,895.88 1411.5,894.73 ccw(c1415.74,890.49) 1411.5,886.24 ccw(c1415.74,890.49) 1419.98,886.24 1421.13,887.39 cw(c1425.38,883.15) 1429.62,878.91 1428.47,877.76 ccw(c1432.71,873.52) 1428.47,869.27 ccw(c1432.71,873.52) 1436.96,869.27 1438.11,870.42 cw(c1442.35,866.18) 1446.59,870.42 cw(c1442.35,866.18) 1446.59,861.94 1445.44,860.79 ccw(c1449.68,856.55) 1445.44,852.3 ccw(c1449.68,856.55) 1453.93,852.3 1455.08,853.45 cw(c1459.32,849.21) 1463.56,853.45 cw(c1459.32,849.21) 1463.56,844.97 1462.41,843.82 ccw(c1466.65,839.58) 1462.41,835.33 ccw(c1466.65,839.58) 1470.9,835.33 1472.05,836.48 cw(c1476.29,832.24) 1480.53,828 1479.38,826.85 ccw(c1483.62,822.6) 1479.38,818.36 ccw(c1483.62,822.6) 1487.87,818.36 1489.02,819.51 cw(c1493.26,815.27) 1497.5,819.51 cw(c1493.26,815.27) 1497.5,811.03 1496.35,809.88 ccw(c1500.59,805.63) 1496.35,801.39 ccw(c1500.59,805.63) 1504.84,801.39 1505.99,802.54 cw(c1510.23,798.3) 1514.47,802.54 cw(c1510.23,798.3) 1514.47,794.06 1513.32,792.91 ccw(c1517.57,788.66) 1521.81,784.42 1522.96,785.57 cw(c1527.2,781.33) 1531.44,785.57 cw(c1527.2,781.33) 1531.44,777.09 1531,776.64 ccw(c1535.24,772.4) 1531,768.16 1539.49,759.67 1541.16,757.99 1541.16,757.11 v1@1541.16,717.36
  other v1: 1540,725
FMC_A9: U7.34 U8.65 | length 1987.5
  Top Layer w6: U7.34@1323.98,1850 1323.98,1807.94 v1@1324.25,1807.67 ; U8.65@1560.47,654.77 v2(1560.47,711) v2@1561.28,711.8
  SIGNAL w6: v1@1324.25,1807.67 1324.25,1806.54 1282.57,1764.86 1172.72,1764.86 1128.33,1720.47 1128.33,1484.7 1140.46,1472.56 1150.6,1462.43 ccw(c1154.84,1466.67) 1159.08,1462.43 1179.35,1482.69 cw(c1183.59,1478.45) 1187.83,1482.69 cw(c1183.59,1478.45) 1187.83,1474.21 1166.86,1453.23 ccw(c1171.1,1448.99) 1166.86,1444.75 ccw(c1171.1,1448.99) 1175.34,1444.75 1196.32,1465.72 cw(c1200.56,1461.48) 1204.8,1457.24 1183.83,1436.26 ccw(c1188.07,1432.02) 1183.83,1427.78 ccw(c1188.07,1432.02) 1192.32,1427.78 1213.29,1448.75 cw(c1217.53,1444.51) 1221.77,1448.75 cw(c1217.53,1444.51) 1221.77,1440.27 1200.8,1419.29 ccw(c1205.04,1415.05) 1200.8,1410.81 ccw(c1205.04,1415.05) 1209.29,1410.81 1230.26,1431.78 cw(c1234.5,1427.54) 1238.75,1431.78 cw(c1234.5,1427.54) 1238.75,1423.3 1217.77,1402.32 ccw(c1222.01,1398.08) 1226.26,1393.84 1247.23,1414.81 cw(c1251.47,1410.57) 1255.72,1414.81 cw(c1251.47,1410.57) 1255.72,1406.33 1234.74,1385.35 ccw(c1238.98,1381.11) 1234.74,1376.87 ccw(c1238.98,1381.11) 1243.23,1376.87 1264.2,1397.84 cw(c1268.44,1393.6) 1272.69,1397.84 cw(c1268.44,1393.6) 1272.69,1389.36 1252.42,1369.09 ccw(c1256.66,1364.85) 1252.42,1360.6 1264.46,1348.56 1264.46,1342.95 1264.46,1331.96 1264.46,1316.24 ccw(c1270.46,1316.24) 1270.46,1310.24 1270.81,1310.24 cw(c1270.81,1304.24) 1270.81,1298.24 1269.46,1298.24 ccw(c1269.46,1292.24) 1269.46,1286.24 1270.81,1286.24 cw(c1270.81,1280.24) 1270.81,1274.24 1270.46,1274.24 ccw(c1270.46,1268.24) 1264.46,1268.24 1264.46,1253.24 1264.46,1077.73 1386.81,955.38 1560,782.19 1560,713.08 v2@1561.28,711.8
  other v1: 1324.11,1807.81
FMC_A10: U7.22 U8.66 | length 1978.9
  Top Layer w6: U7.22@1292.48,2294.26 v1(1292.48,2239.63) v1@1293.05,2239.07 ; v1@1493.43,752.79 1543.1,752.79 1580.16,715.73 U8.66@1580.16,654.77
  SIGNAL w6: v2@1117.53,1989.37 1117.53,1989.1 1069.76,1941.34 1069.76,1789.1 1067.91,1787.25 1067.91,1760.46 1072,1756.37 1072,1405.34 1195.96,1281.39 1195.96,1051.05 1494.22,752.79 v1(1498.43,752.79)
  Bottom Layer w6: v2@1117.53,1989.37 1117.79,1989.37 1293.05,2164.62 v1@1293.05,2239.07
  other v2: 1117.28,1989.62
FMC_A11: U7.35 U8.67 | length 2004.5
  Top Layer w6: v1(1355.47,1807.67) U7.35@1355.47,1850 ; U8.67@1600.47,654.77 v2(1600.47,718.16)
  SIGNAL w6: 1217.87,1531.81 ccw(c1213.63,1527.57) 1209.39,1531.81 1202.37,1524.8 cw(c1198.13,1529.04) 1193.89,1524.8 cw(c1198.13,1529.04) 1193.89,1533.28 1200.9,1540.3 ccw(c1196.66,1544.54) 1200.9,1548.78 ccw(c1196.66,1544.54) 1192.42,1548.79 1186.11,1542.48 cw(c1181.87,1546.72) 1177.62,1542.48 1155.47,1564.63 1147.03,1573.07 1147.03,1705.21 1190.79,1748.97 1296.77,1748.97 v1(1355.47,1807.67) ; 1217.88,1531.81 cw(c1213.63,1527.57) 1217.88,1523.33 1210.86,1516.31 ccw(c1215.1,1512.07) 1210.86,1507.83 ccw(c1215.1,1512.07) 1219.34,1507.83 1226.36,1514.84 cw(c1230.6,1510.6) 1234.85,1506.36 1227.83,1499.34 ccw(c1232.07,1495.1) 1227.83,1490.86 ccw(c1232.07,1495.1) 1236.31,1490.86 1243.33,1497.87 cw(c1247.57,1493.63) 1251.82,1497.87 cw(c1247.57,1493.63) 1251.82,1489.39 1244.8,1482.37 ccw(c1249.04,1478.13) 1244.8,1473.89 ccw(c1249.04,1478.13) 1253.29,1473.89 1260.3,1480.9 cw(c1264.54,1476.66) 1268.79,1480.9 cw(c1264.54,1476.66) 1268.79,1472.42 1261.77,1465.4 ccw(c1266.01,1461.16) 1270.26,1456.92 1277.27,1463.93 cw(c1281.51,1459.69) 1285.76,1463.93 cw(c1281.51,1459.69) 1285.76,1455.45 1279.45,1449.14 ccw(c1283.69,1444.9) 1279.45,1440.65 1290.06,1430.05 1292.55,1427.55 1292.55,1419.97 1292.55,1416.97 ccw(c1298.55,1416.97) 1298.55,1410.97 1298.62,1410.97 cw(c1298.62,1404.97) 1298.62,1398.97 1297.55,1398.97 ccw(c1297.55,1392.97) 1297.55,1386.97 1298.62,1386.97 cw(c1298.62,1380.97) 1298.62,1374.97 1297.55,1374.97 ccw(c1297.55,1368.97) 1297.55,1362.97 1298.62,1362.97 cw(c1298.62,1356.97) 1298.62,1350.97 1297.55,1350.97 ccw(c1297.55,1344.97) 1297.55,1338.97 1298.62,1338.97 cw(c1298.62,1332.97) 1298.62,1326.97 1297.55,1326.97 ccw(c1297.55,1320.97) 1297.55,1314.97 1298.62,1314.97 cw(c1298.62,1308.97) 1298.62,1302.97 1297.55,1302.97 ccw(c1297.55,1296.97) 1297.55,1290.97 1298.62,1290.97 cw(c1298.62,1284.97) 1298.62,1278.97 1297.55,1278.97 ccw(c1297.55,1272.97) 1297.55,1266.97 1298.62,1266.97 cw(c1298.62,1260.97) 1298.62,1254.97 1297.55,1254.97 ccw(c1297.55,1248.97) 1297.55,1242.97 1298.62,1242.97 cw(c1298.62,1236.97) 1298.62,1230.97 1297.55,1230.97 ccw(c1297.55,1224.97) 1297.55,1218.97 1298.62,1218.97 cw(c1298.62,1212.97) 1298.62,1206.97 1297.55,1206.97 ccw(c1297.55,1200.97) 1297.55,1194.97 1298.62,1194.97 cw(c1298.62,1188.97) 1298.62,1182.97 1297.55,1182.97 ccw(c1297.55,1176.97) 1297.55,1170.97 1298.62,1170.97 cw(c1298.62,1164.97) 1298.62,1158.97 1297.55,1158.97 ccw(c1297.55,1152.97) 1297.55,1146.97 1298.62,1146.97 cw(c1298.62,1140.97) 1298.62,1134.97 1297.55,1134.97 ccw(c1297.55,1128.97) 1297.55,1122.97 1298.62,1122.97 cw(c1298.62,1116.97) 1298.62,1110.97 1298.55,1110.97 ccw(c1298.55,1104.97) 1292.55,1104.97 1292.55,1084.79 1298.74,1078.59 1307.33,1070 1309.46,1067.88 ccw(c1313.7,1072.12) 1317.94,1067.88 1318.72,1068.66 cw(c1322.97,1064.42) 1327.21,1068.66 cw(c1322.97,1064.42) 1327.21,1060.18 1325.72,1058.69 ccw(c1329.96,1054.44) 1325.72,1050.2 ccw(c1329.96,1054.44) 1334.2,1050.2 1335.69,1051.69 cw(c1339.94,1047.45) 1344.18,1043.2 1342.69,1041.72 ccw(c1346.93,1037.47) 1342.69,1033.23 ccw(c1346.93,1037.47) 1351.18,1033.23 1352.66,1034.72 cw(c1356.91,1030.48) 1361.15,1034.72 cw(c1356.91,1030.48) 1361.15,1026.23 1359.66,1024.74 ccw(c1363.9,1020.5) 1359.66,1016.26 ccw(c1363.9,1020.5) 1368.15,1016.26 1369.64,1017.75 cw(c1373.88,1013.51) 1378.12,1017.75 cw(c1373.88,1013.51) 1378.12,1009.26 1377.34,1008.48 ccw(c1381.58,1004.24) 1377.34,1000 1392.85,984.48 1403.8,973.53 1600.64,776.7 v2@1600.64,717.91
FMC_A12: U7.36 U8.106 | length 2016
  Top Layer w6: U7.36@1386.97,1850 v1@1386.97,1899.76 ; v1@2020.48,1070 2030.2,1060.28 U8.106@2084.09,1060.28
  SIGNAL w6: v1@1386.97,1899.76 1386.97,1945.18 1416.79,1975 2120.02,1975 2192.87,1902.16 2192.87,1271.34 2192.78,1271.26 2192.78,1192.78 2156.12,1156.12 2118.27,1156.12 2115.27,1156.12 ccw(c2115.27,1150.12) 2109.27,1150.12 2109.27,1150.03 cw(c2103.27,1150.03) 2097.27,1150.03 2097.27,1151.12 ccw(c2091.27,1151.12) 2085.27,1151.12 2085.27,1150.03 cw(c2079.27,1150.03) 2073.27,1150.03 2073.27,1150.12 ccw(c2067.27,1150.12) 2067.27,1156.12 2052.31,1156.12 2035.91,1156.12 2019.27,1139.48 2019.27,1071.21 v1@2020.48,1070
  other v1: 2020.74,1070 1387.14,1898.2
FMC_BA0: U7.20 U8.108 | length 2036.4
  Top Layer w6: v1(1355.47,2240.22) U7.20@1355.47,2294.26 ; U8.108@2084.09,1099.65 2084.51,1099.23 2160.74,1099.23 v1(2162.07,1097.9)
  SIGNAL w6: v1(1355.47,2240.22) 1355.47,2198.69 1412.16,2142 2038.64,2142 2226.03,1954.62 2226.03,1149.4 2176.44,1099.82 2163.98,1099.82 v1(2162.07,1097.9)
FMC_BA1: U7.21 U8.109 | length 2006.8
  Top Layer w6: v1(1323.98,2240.22) U7.21@1323.98,2294.26 ; U8.109@2084.09,1119.33 v1(2136.69,1119.33) v1@2136.77,1119.42
  SIGNAL w6: v1(1323.98,2240.22) 1325,2239.2 1325,2204.86 1408.18,2121.68 2027.93,2121.68 2210.51,1939.1 2210.51,1161.68 2168.26,1119.42 v1@2136.77,1119.42
FMC_D0: U7.2 U8.104 | length 1995.4
  Top Layer w6: v1(1922.4,2245.03) U7.2@1922.4,2294.26 ; U8.104@2084.09,1020.91 2162.4,1020.91 v1(2163.4,1021.91)
  SIGNAL w6: v1(1922.4,2245.03) 1986.75,2180.68 2061.19,2180.68 2266.86,1975 2266.86,1402.56 2306.18,1363.24 2306.18,1332.64 2306.18,1301.1 ccw(c2312.18,1301.1) 2312.18,1295.1 2317.82,1295.1 cw(c2317.82,1289.1) 2317.82,1283.1 2311.18,1283.1 ccw(c2311.18,1277.1) 2311.18,1271.1 2317.82,1271.1 cw(c2317.82,1265.1) 2317.82,1259.1 2311.18,1259.1 ccw(c2311.18,1253.1) 2311.18,1247.1 2317.82,1247.1 cw(c2317.82,1241.1) 2317.82,1235.1 2311.18,1235.1 ccw(c2311.18,1229.1) 2311.18,1223.1 2317.82,1223.1 cw(c2317.82,1217.1) 2317.82,1211.1 2311.18,1211.1 ccw(c2311.18,1205.1) 2311.18,1199.1 2317.82,1199.1 cw(c2317.82,1193.1) 2317.82,1187.1 2312.18,1187.1 ccw(c2312.18,1181.1) 2306.18,1181.1 2306.18,1166.1 2306.18,1156.02 2306.18,1154.68 2289.93,1138.43 ccw(c2294.17,1134.19) 2289.93,1129.95 2299.4,1120.47 cw(c2295.16,1116.23) 2299.4,1111.99 cw(c2295.16,1116.23) 2290.92,1111.99 2280.74,1122.17 ccw(c2276.49,1117.93) 2272.25,1113.69 2282.43,1103.5 cw(c2278.19,1099.26) 2282.43,1095.02 cw(c2278.19,1099.26) 2273.95,1095.02 2263.76,1105.2 ccw(c2259.52,1100.96) 2255.28,1105.2 ccw(c2259.52,1100.96) 2255.28,1096.71 2265.46,1086.53 cw(c2261.22,1082.29) 2256.98,1078.05 2246.79,1088.23 ccw(c2242.55,1083.99) 2238.31,1088.23 ccw(c2242.55,1083.99) 2238.31,1079.74 2248.49,1069.56 cw(c2244.25,1065.32) 2248.49,1061.08 cw(c2244.25,1065.32) 2240.01,1061.08 2229.82,1071.26 ccw(c2225.58,1067.02) 2221.34,1071.26 ccw(c2225.58,1067.02) 2221.34,1062.77 2231.52,1052.59 cw(c2227.28,1048.35) 2231.52,1044.11 cw(c2227.28,1048.35) 2223.04,1044.11 2212.85,1054.29 ccw(c2208.61,1050.05) 2204.37,1045.8 2214.55,1035.62 cw(c2210.31,1031.38) 2214.55,1027.14 cw(c2210.31,1031.38) 2206.06,1027.14 2196.59,1036.61 ccw(c2192.35,1032.37) 2188.1,1036.61 2177.5,1026 v1@2173.55,1022.06